# Altium PCB RS485_GPIO.PcbDoc (part 2 of 3)
Units mm, origin at the board's own origin, x right, y up, seen from the top; angles counter-clockwise.
Board outline 152.4 x 101.6 mm, 2 copper layers (Top Layer, Bottom Layer); 132 components, 100 nets, 460 pads, 0 vias.
Unrouted connection lines stored in the file: 308.
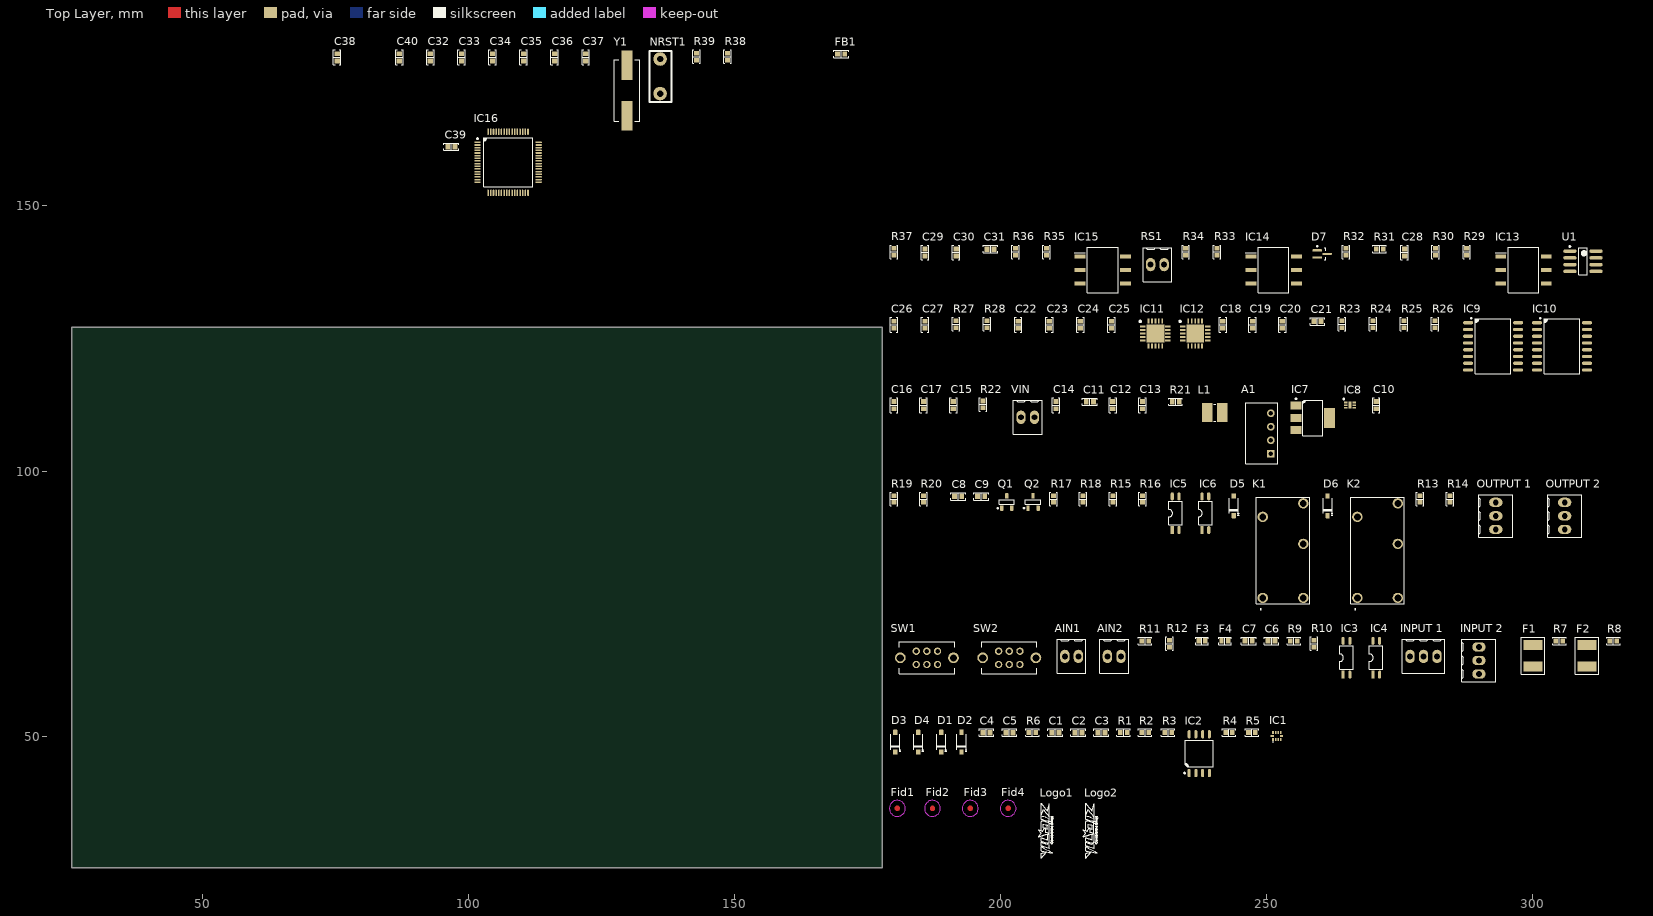
[diagram p0: Top Layer view]

## Part data (continued)
IC3 IC4 IC5 IC6: library part Optoisolator, Case/Package=SSOP, Collector Emitter Breakdown Voltage=80V, Collector Emitter Saturation Voltage=200mV, Current Transfer Ratio=260%, Forward Current=50mA, Forward Voltage=1.4V, Isolation Voltage=3.75kV, Manufacturer=Everlight, Max Operating Temperature=125°C, Max Power Dissipation=200mW, Min Operating Temperature=-55°C, Package Quantity=1, Reverse Breakdown Voltage=6V, Supplier Part Number 1=1080-1197-1-ND, Approvals=UL, Collector Emitter Voltage (VCEO)=80V, ComponentLink1Description=https://datasheet.ciiva.com/2086/el3h7-g-series-2086501.pdf?src-supplier=Digi-Key, ComponentLink1URL=https://datasheet.ciiva.com/2086/el3h7-g-series-2086501.pdf?src-supplier=Digi-Key, ComponentLink2Description=https://datasheet.ciiva.com/2086/el3h7-g-series-2086502.pdf?src-supplier=Digi-Key, ComponentLink2URL=https://datasheet.ciiva.com/2086/el3h7-g-series-2086502.pdf?src-supplier=Digi-Key, ComponentLink3Description=https://datasheet.ciiva.com/2086/el3h7-g-series-2086503.pdf?src-supplier=Digi-Key, ComponentLink3URL=https://datasheet.ciiva.com/2086/el3h7-g-series-2086503.pdf?src-supplier=Digi-Key, ComponentLink4Description=https://datasheet.ciiva.com/15209/getdatasheetpartid-416716-15209115.pdf?src-supplier=Verical, ComponentLink4URL=https://datasheet.ciiva.com/15209/getdatasheetpartid-416716-15209115.pdf?src-supplier=Verical, Fall Time=18000ns, Lead Free="Lead Free", Manufacturer Part Number=EL3H7(B)(TA)-VG, Max Collector Current=50mA, Max Input Current=50mA, Max Output Voltage=80V, Mount="Surface Mount", Number of Channels=1, Number of Elements=1, Number of Pins=4, Output Current per Channel=50mA, Packaging="Tape and Reel", Power Dissipation=200mW, Pricing 1="1 = 0,50000, 10 = 0,35500, 100 = 0,20730, 500 = 0,14212, 1000 = 0,11844, 2500 = 0,10660 (USD)", Radiation Hardening=No, Rise Time=18000ns, RoHS=Yes, Stock 1=29823, Supplier 1=Digi-Key
IC7: library part "TI UA78M33CDCYR", "Undefined or Miscellaneous", Case/Package=SOT-223-4, Dropout Voltage=2V, Manufacturer="Texas Instruments", Manufacturer Part Number=UA78M33CDCYR, Max Input Voltage=25V, Max Operating Temperature=125°C, Max Output Current=500mA, Min Input Voltage=5.3V, Min Operating Temperature=-40°C, Nominal Output Voltage=3.3V, Package Quantity=1, Power Supply Rejection Ratio (PSRR)=80dB, Quiescent Current=4.5mA, Supplier Part Number 1=296-13424-1-ND, ComponentLink1Description=https://datasheet.ciiva.com/46395/1882046-46395062.pdf?src-supplier=Element14, ComponentLink1URL=https://datasheet.ciiva.com/46395/1882046-46395062.pdf?src-supplier=Element14, ComponentLink2Description=https://datasheet.ciiva.com/7992/1882046-7992586.pdf?src-supplier=Element14, ComponentLink2URL=https://datasheet.ciiva.com/7992/1882046-7992586.pdf?src-supplier=Element14, ComponentLink3Description=https://datasheet.ciiva.com/2042/ua78m05-2042171.pdf?src-supplier=Digi-Key, ComponentLink3URL=https://datasheet.ciiva.com/2042/ua78m05-2042171.pdf?src-supplier=Digi-Key, ComponentLink4Description=https://datasheet.ciiva.com/3224/ua78m05-3224619.pdf?src-supplier=Avnet, ComponentLink4URL=https://datasheet.ciiva.com/3224/ua78m05-3224619.pdf?src-supplier=Avnet, ComponentLink5Description=https://datasheet.ciiva.com/2042/ua78m05-2042172.pdf?src-supplier=Digi-Key, ComponentLink5URL=https://datasheet.ciiva.com/2042/ua78m05-2042172.pdf?src-supplier=Digi-Key, ComponentLink6Description=https://datasheet.ciiva.com/26170/ua78m12-26170716.pdf?src-supplier=Avnet+Europe, ComponentLink6URL=https://datasheet.ciiva.com/26170/ua78m12-26170716.pdf?src-supplier=Avnet+Europe, ComponentLink7Description=https://datasheet.ciiva.com/2042/ua78m05-2042173.pdf?src-supplier=Digi-Key, ComponentLink7URL=https://datasheet.ciiva.com/2042/ua78m05-2042173.pdf?src-supplier=Digi-Key, ComponentLink8Description=https://datasheet.ciiva.com/41463/001015184-da-01-en-ic-reg-3-3v-u-ua78m33cdcyr-sot-223-4-tid-41463029.pdf?src-supplier=Conrad, ComponentLink8URL=https://datasheet.ciiva.com/41463/001015184-da-01-en-ic-reg-3-3v-u-ua78m33cdcyr-sot-223-4-tid-41463029.pdf?src-supplier=Conrad, Contact Plating=Tin,Matte, Lead Free="Lead Free", Mount="Surface Mount", Number of Outputs=1, Number of Pins=4, Number of Regulators=1, Output Current=500mA, Output Type=Fixed, Output Voltage=3.3V, Packaging="Tape and Reel", Polarity=Positive, Pricing 1="1 = 0,57000, 10 = 0,48800, 25 = 0,45520, 100 = 0,33800, 250 = 0,28600, 500 = 0,27300, 1000 = 0,20150 (USD)", Radiation Hardening=No, REACH SVHC="No SVHC", RoHS=Yes, Stock 1=37541, Supplier 1=Digi-Key, Weight=0.006632oz
IC8: library part "MICROCHIP MIC5353", "Integrated Circuit", Manufacturer=Microchip, Manufacturer Part Number=MIC5353YMT-TR, Supplier Part Number 1=576-3681-1-ND, ComponentLink1Description=http://www.farnell.com/datasheets/2245202.pdf?src-supplier=Farnell, ComponentLink1URL=http://www.farnell.com/datasheets/2245202.pdf?src-supplier=Farnell, ComponentLink2Description=http://www.microchip.com/mymicrochip/filehandler.aspx?ddocname=en579989&src-supplier=Digi-Key, ComponentLink2URL=http://www.microchip.com/mymicrochip/filehandler.aspx?ddocname=en579989&src-supplier=Digi-Key, ComponentLink3Description=http://www.farnell.com/datasheets/1692673.pdf?src-supplier=Element14, ComponentLink3URL=http://www.farnell.com/datasheets/1692673.pdf?src-supplier=Element14, ComponentLink4Description=https://datasheet.ciiva.com/2049/mic5353-2049344.pdf?src-supplier=Digi-Key, ComponentLink4URL=https://datasheet.ciiva.com/2049/mic5353-2049344.pdf?src-supplier=Digi-Key, ComponentLink5Description=https://datasheet.ciiva.com/2049/mic5353-2049342.pdf?src-supplier=Digi-Key, ComponentLink5URL=https://datasheet.ciiva.com/2049/mic5353-2049342.pdf?src-supplier=Digi-Key, ComponentLink6Description=https://datasheet.ciiva.com/2049/mic5353-2049343.pdf?src-supplier=Digi-Key, ComponentLink6URL=https://datasheet.ciiva.com/2049/mic5353-2049343.pdf?src-supplier=Digi-Key, Pricing 1="1 = 0,34000, 25 = 0,28000, 100 = 0,26000 (USD)", RoHS=Yes, Stock 1=1004, Supplier 1=Digi-Key
IC9 IC10: library part "SI LABS SI8652", Case/Package=SOIC, Isolated Power=No, Manufacturer="Silicon Labs", Manufacturer Part Number=Si8652AB-B-IS1R, Max Operating Temperature=125°C, Max Power Dissipation=415mW, Max Supply Voltage=5.5V, Min Operating Temperature=-40°C, Min Supply Voltage=2.7V, Operating Supply Current=4.1mA, Package Quantity=2500, Supplier Part Number 1=336-5216-1-ND, Channel Type=Unidirectional, ComponentLink1Description=https://datasheet.ciiva.com/29891/si86xx-29891881.pdf?src-supplier=Avnet, ComponentLink1URL=https://datasheet.ciiva.com/29891/si86xx-29891881.pdf?src-supplier=Avnet, ComponentLink2Description=https://datasheet.ciiva.com/29659/si86xx-29659290.pdf?src-supplier=Digi-Key, ComponentLink2URL=https://datasheet.ciiva.com/29659/si86xx-29659290.pdf?src-supplier=Digi-Key, Data Rate=1Mbps, Number of Channels=5, Number of Pins=16, Packaging="Tape and Reel", Pricing 1="1 = 2,10000, 25 = 2,02120, 100 = 1,94360 (USD)", Propagation Delay=35ns, Pulse Width Distortion (PWD)=25ns, RoHS=Yes, Stock 1=2236, Supplier 1=Digi-Key, Type="General Purpose"
IC11 IC12: library part "Maxim MAX31865", "RTD-to-Digital Converter", Case/Package=SSOP, Manufacturer=Maxim, Manufacturer Part Number=MAX31865AAP+T, Max Operating Temperature=125°C, Min Operating Temperature=-40°C, Supplier Part Number 1=MAX31865AAP+TCT-ND, ComponentLink1Description=https://datasheet.ciiva.com/14320/max31865-14320743.pdf?src-supplier=Avnet, ComponentLink1URL=https://datasheet.ciiva.com/14320/max31865-14320743.pdf?src-supplier=Avnet, ComponentLink2Description=https://datasheet.ciiva.com/25893/max31865-25893916.pdf?src-supplier=Avnet+Europe, ComponentLink2URL=https://datasheet.ciiva.com/25893/max31865-25893916.pdf?src-supplier=Avnet+Europe, ComponentLink3Description=https://datasheet.ciiva.com/14083/max31865-14083679.pdf?src-supplier=Digi-Key, ComponentLink3URL=https://datasheet.ciiva.com/14083/max31865-14083679.pdf?src-supplier=Digi-Key, ComponentLink4Description=https://media.digikey.com/pdf/Data%20Sheets/Maxim%20PDFs/PartNumberBreakdown_ds.pdf?src-supplier=Digi-Key, ComponentLink4URL=https://media.digikey.com/pdf/Data%20Sheets/Maxim%20PDFs/PartNumberBreakdown_ds.pdf?src-supplier=Digi-Key, ComponentLink5Description=http://www.farnell.com/datasheets/2345101.pdf?src-supplier=Farnell, ComponentLink5URL=http://www.farnell.com/datasheets/2345101.pdf?src-supplier=Farnell, ComponentLink6Description=http://www.mouser.com/ds/2/256/MAX31865-775735.pdf?src-supplier=Mouser, ComponentLink6URL=http://www.mouser.com/ds/2/256/MAX31865-775735.pdf?src-supplier=Mouser, ComponentLink7Description=https://datasheets.maximintegrated.com/en/ds/MAX31865.pdf?src-supplier=Digi-Key, ComponentLink7URL=https://datasheets.maximintegrated.com/en/ds/MAX31865.pdf?src-supplier=Digi-Key, Mount="Surface Mount", Output Type=SPI, Packaging="Tape and Reel", Pricing 1="1 = 5,14000, 10 = 4,64400, 25 = 4,42800, 100 = 3,67200, 250 = 3,51000 (USD)", RoHS=Yes, Stock 1=3767, Supplier 1=Digi-Key
IC13: "Integrated Circuit", Case/Package=SMD/SMT, Forward Current=60mA, Forward Voltage=1.2V, Isolation Voltage=7.5kV, Manufacturer="ON Semiconductor / Fairchild", Max Input Current=30mA, Max Operating Temperature=85°C, Max Output Current=50mA, Max Output Voltage=15V, Max Power Dissipation=250mW, Min Operating Temperature=-40°C, Output Voltage=16V, Package Quantity=1000, Reverse Breakdown Voltage=6V, Supplier Part Number 1=H11L1SVM-ND, ComponentLink1Description=https://datasheet.ciiva.com/2085/h11l1s-2085370.pdf?src-supplier=Digi-Key, ComponentLink1URL=https://datasheet.ciiva.com/2085/h11l1s-2085370.pdf?src-supplier=Digi-Key, ComponentLink2Description=https://datasheet.ciiva.com/2085/h11l1s-2085371.pdf?src-supplier=Digi-Key, ComponentLink2URL=https://datasheet.ciiva.com/2085/h11l1s-2085371.pdf?src-supplier=Digi-Key, ComponentLink3Description=https://datasheet.ciiva.com/26306/h11lx-eng-tds-26306987.pdf?src-supplier=Distrelec, ComponentLink3URL=https://datasheet.ciiva.com/26306/h11lx-eng-tds-26306987.pdf?src-supplier=Distrelec, ComponentLink4Description=https://datasheet.ciiva.com/2085/h11l1s-2085372.pdf?src-supplier=Digi-Key, ComponentLink4URL=https://datasheet.ciiva.com/2085/h11l1s-2085372.pdf?src-supplier=Digi-Key, ComponentLink5Description=http://www.farnell.com/datasheets/1874889.pdf?src-supplier=Farnell, ComponentLink5URL=http://www.farnell.com/datasheets/1874889.pdf?src-supplier=Farnell, ComponentLink6Description=http://www.farnell.com/datasheets/2303834.pdf?src-supplier=Farnell, ComponentLink6URL=http://www.farnell.com/datasheets/2303834.pdf?src-supplier=Farnell, ComponentLink7Description=https://www.fairchildsemi.com/datasheets/H1/H11L1M.pdf?src-supplier=Digi-Key, ComponentLink7URL=https://www.fairchildsemi.com/datasheets/H1/H11L1M.pdf?src-supplier=Digi-Key, ComponentLink8Description=http://www.onsemi.com/pub/Collateral/H11L3M-D.pdf?src-supplier=Digi-Key, ComponentLink8URL=http://www.onsemi.com/pub/Collateral/H11L3M-D.pdf?src-supplier=Digi-Key, ComponentLink9Description=http://www.farnell.com/datasheets/2303834.pdf?src-supplier=Newark, ComponentLink9URL=http://www.farnell.com/datasheets/2303834.pdf?src-supplier=Newark, ComponentLink10Description=https://datasheet.ciiva.com/15119/getdatasheetpartid-129979-15119729.pdf?src-supplier=Verical, ComponentLink10URL=https://datasheet.ciiva.com/15119/getdatasheetpartid-129979-15119729.pdf?src-supplier=Verical, ComponentLink11Description=https://datasheet.ciiva.com/29694/940174-29694862.pdf?src-supplier=Jameco, ComponentLink11URL=https://datasheet.ciiva.com/29694/940174-29694862.pdf?src-supplier=Jameco, ComponentLink12Description=https://datasheet.ciiva.com/2083/h11l1m-2083647.pdf?src-supplier=Digi-Key, ComponentLink12URL=https://datasheet.ciiva.com/2083/h11l1m-2083647.pdf?src-supplier=Digi-Key, Data Rate=1Mbps, Direction=Unidirectional, Fall Time=0.1us, Height=3.53mm, Input Current=60mA, Lead Free="Lead Free", Length=8.89mm, Manufacturer Part Number=H11L1SVM, Mount="Surface Mount", Number of Channels=1, Number of Circuits=1, Number of Elements=1, Number of Pins=6, Output Current=50mA, Output Current per Channel=50mA, Packaging=Bulk, Polarity=Inverting, Power Dissipation=250mW, Pricing 1="1 = 1,08000, 10 = 0,83600, 100 = 0,53750, 500 = 0,45392, 1000 = 0,35835, 2500 = 0,33446 (USD)", Propagation Delay=4000ns, Radiation Hardening=No, REACH SVHC="No SVHC", Reverse Voltage (DC)=6V, Rise Time=0.1us, RoHS=Yes, Stock 1=3464, Supplier 1=Digi-Key, Turn-On Delay Time=4000ns, Weight=0.81g, Width=6.6mm
IC14 IC15: "Integrated Circuit", Case/Package=SMD/SMT, Forward Current=60mA, Forward Voltage=1.2V, Isolation Voltage=7.5kV, Manufacturer="ON Semiconductor", Manufacturer Part Number=H11L1SR2M, Max Input Current=30mA, Max Operating Temperature=85°C, Max Output Current=50mA, Max Output Voltage=15V, Max Power Dissipation=250mW, Min Operating Temperature=-40°C, Output Voltage=16V, Package Quantity=1000, Reverse Breakdown Voltage=6V, Supplier Part Number 1=H11L1SR2MCT-ND, ComponentLink1Description=https://datasheet.ciiva.com/2085/h11l1s-2085370.pdf?src-supplier=Digi-Key, ComponentLink1URL=https://datasheet.ciiva.com/2085/h11l1s-2085370.pdf?src-supplier=Digi-Key, ComponentLink2Description=https://datasheet.ciiva.com/2085/h11l1s-2085371.pdf?src-supplier=Digi-Key, ComponentLink2URL=https://datasheet.ciiva.com/2085/h11l1s-2085371.pdf?src-supplier=Digi-Key, ComponentLink3Description=https://datasheet.ciiva.com/26306/h11lx-eng-tds-26306987.pdf?src-supplier=Distrelec, ComponentLink3URL=https://datasheet.ciiva.com/26306/h11lx-eng-tds-26306987.pdf?src-supplier=Distrelec, ComponentLink4Description=https://datasheet.ciiva.com/2085/h11l1s-2085372.pdf?src-supplier=Digi-Key, ComponentLink4URL=https://datasheet.ciiva.com/2085/h11l1s-2085372.pdf?src-supplier=Digi-Key, ComponentLink5Description=http://www.farnell.com/datasheets/1874889.pdf?src-supplier=Farnell, ComponentLink5URL=http://www.farnell.com/datasheets/1874889.pdf?src-supplier=Farnell, ComponentLink6Description=http://www.farnell.com/datasheets/2303834.pdf?src-supplier=Farnell, ComponentLink6URL=http://www.farnell.com/datasheets/2303834.pdf?src-supplier=Farnell, ComponentLink7Description=https://www.fairchildsemi.com/datasheets/H1/H11L1M.pdf?src-supplier=Digi-Key, ComponentLink7URL=https://www.fairchildsemi.com/datasheets/H1/H11L1M.pdf?src-supplier=Digi-Key, ComponentLink8Description=http://www.onsemi.com/pub/Collateral/H11L3M-D.pdf?src-supplier=Digi-Key, ComponentLink8URL=http://www.onsemi.com/pub/Collateral/H11L3M-D.pdf?src-supplier=Digi-Key, ComponentLink9Description=http://www.farnell.com/datasheets/2303834.pdf?src-supplier=Newark, ComponentLink9URL=http://www.farnell.com/datasheets/2303834.pdf?src-supplier=Newark, ComponentLink10Description=https://datasheet.ciiva.com/15119/getdatasheetpartid-129979-15119729.pdf?src-supplier=Verical, ComponentLink10URL=https://datasheet.ciiva.com/15119/getdatasheetpartid-129979-15119729.pdf?src-supplier=Verical, ComponentLink11Description=https://datasheet.ciiva.com/29694/940174-29694862.pdf?src-supplier=Jameco, ComponentLink11URL=https://datasheet.ciiva.com/29694/940174-29694862.pdf?src-supplier=Jameco, ComponentLink12Description=https://datasheet.ciiva.com/2083/h11l1m-2083647.pdf?src-supplier=Digi-Key, ComponentLink12URL=https://datasheet.ciiva.com/2083/h11l1m-2083647.pdf?src-supplier=Digi-Key, Data Rate=1Mbps, Direction=Unidirectional, Fall Time=0.1us, Height=3.53mm, Input Current=60mA, Lead Free="Lead Free", Length=8.89mm, Mount="Surface Mount", Number of Channels=1, Number of Circuits=1, Number of Elements=1, Number of Pins=6, Output Current=50mA, Output Current per Channel=50mA, Packaging=Bulk, Polarity=Inverting, Power Dissipation=250mW, Pricing 1="1 = 0,92000, 10 = 0,71400, 100 = 0,45900, 500 = 0,38760 (USD)", Pricing 2="1 = 1,08000, 10 = 0,83600, 100 = 0,53750, 500 = 0,45392, 1000 = 0,35835, 2500 = 0,33446 (USD)", Propagation Delay=4000ns, Radiation Hardening=No, REACH SVHC="No SVHC", Reverse Voltage (DC)=6V, Rise Time=0.1us, RoHS=No, Stock 1=23913, Stock 2=3464, Supplier 1=Digi-Key, Supplier 2=Digi-Key, Supplier Part Number 2=H11L1SVM-ND, Turn-On Delay Time=4000ns, Weight=0.81g, Width=6.6mm
IC16: library part "ST STM32F030RxT 64PIN", "32-bit ARM Cortex-M0 microcontroller", Case/Package=LQFP, Frequency=48MHz, Manufacturer=STMicroelectronics, Manufacturer Part Number=STM32F030R8T6TR, Max Operating Temperature=85°C, Max Power Dissipation=444mW, Max Supply Voltage=3.6V, Min Operating Temperature=-40°C, Min Supply Voltage=2.3V, Operating Supply Voltage=3.3V, Package Quantity=1000, Supplier Part Number 1=497-17335-1-ND, ComponentLink1Description=http://www.mouser.com/ds/2/389/stm32f030f4-956260.pdf?src-supplier=Mouser, ComponentLink1URL=http://www.mouser.com/ds/2/389/stm32f030f4-956260.pdf?src-supplier=Mouser, ComponentLink2Description=http://www.st.com/st-web-ui/static/active/en/resource/technical/document/datasheet/DM00088500.pdf?src-supplier=Avnet, ComponentLink2URL=http://www.st.com/st-web-ui/static/active/en/resource/technical/document/datasheet/DM00088500.pdf?src-supplier=Avnet, ComponentLink3Description=http://www.st.com/content/ccc/resource/technical/document/datasheet/a4/5d/0b/0e/87/c4/4d/71/DM00088500.pdf/files/DM00088500.pdf/jcr:content/translations/en.DM00088500.pdf?src-supplier=Digi-Key, ComponentLink3URL=http://www.st.com/content/ccc/resource/technical/document/datasheet/a4/5d/0b/0e/87/c4/4d/71/DM00088500.pdf/files/DM00088500.pdf/jcr:content/translations/en.DM00088500.pdf?src-supplier=Digi-Key, ComponentLink4Description=http://www.st.com/content/ccc/resource/technical/document/user_manual/1d/d4/af/64/18/0d/42/2c/DM00111791.pdf/files/DM00111791.pdf/jcr:content/translations/en.DM00111791.pdf?src-supplier=Digi-Key, ComponentLink4URL=http://www.st.com/content/ccc/resource/technical/document/user_manual/1d/d4/af/64/18/0d/42/2c/DM00111791.pdf/files/DM00111791.pdf/jcr:content/translations/en.DM00111791.pdf?src-supplier=Digi-Key, ComponentLink5Description=http://www.st.com/st-web-ui/static/active/en/resource/technical/document/datasheet/DM00088500.pdf?src-supplier=Avnet+Asia, ComponentLink5URL=http://www.st.com/st-web-ui/static/active/en/resource/technical/document/datasheet/DM00088500.pdf?src-supplier=Avnet+Asia, Core Architecture=ARM, Data Bus Width=32b, Interface=I2C,SPI,UART,USART, Lead Free="Lead Free", Max Frequency=48MHz, Memory Size=64KB, Memory Type=FLASH, Mount="Surface Mount", Number of ADC Channels=18, Number of I/Os=55, Number of Pins=64, Number of Programmable I/O=55, Number of Timers/Counters=6, Oscillator Type=Internal, Packaging="Tape and Reel", Peripherals=POR,PWM,WDT,DMA, Pricing 1="1 = 1,87000, 10 = 1,67900, 25 = 1,58400, 100 = 1,34960, 250 = 1,26720, 500 = 1,10880 (USD)", Radiation Hardening=No, RAM Size=8KB, RoHS=Yes, Stock 1=1142, Supplier 1=Digi-Key, Watchdog Timer=Yes, Weight=0.012088oz
"INPUT 1" "INPUT 2": library part "3 Pin", "TERM BLOCK HDR 3POS R/A 3.81MM", Color=Green, Current=6A, Manufacturer="On-Shore Technology", Manufacturer Part Number=OSTVN03A150, Max Operating Temperature=105°C, Min Operating Temperature=-30°C, Supplier Part Number 1=ED10562-ND, Voltage=125V, ComponentLink1Description=Datasheet, ComponentLink1URL=http://portal.fciconnect.com/Comergent//fci/drawing/20020110.pdf, ComponentLink2Description="Digi-Key Listing", ComponentLink2URL=http://www.digikey.ca/product-detail/en/20020110-D031A01LF/609-3820-ND/2261261, ComponentLink3Description=https://datasheet.ciiva.com/825/ostvnxxa150-825196.pdf?src-supplier=Digi-Key, ComponentLink3URL=https://datasheet.ciiva.com/825/ostvnxxa150-825196.pdf?src-supplier=Digi-Key, Contact Plating=Brass, Housing Material=Thermoplastic, Mount="Through Hole", Number of Levels=1, Number of Pins=3, Number of Positions Per Level=3, Packaging=Bulk, Pitch=0.1inch, Plating=Brass,Steel, Pricing 1="1 = 1,03000, 10 = 0,72600, 25 = 0,67720, 50 = 0,61480, 100 = 0,61200, 250 = 0,51680, 500 = 0,48960, 1000 = 0,43520, 5000 = 0,35360 (USD)", RoHS=Yes, Stock 1=6258, Supplier 1=Digi-Key, Termination=Screw, Wire Gauge (Max)=30AWG, Wire Gauge (Min)=20AWG
K1 K2: library part "Relay SPDT", "Relay or Contactor", Coil Current=80mA, Coil Power=400mW, Coil Resistance=62.5R, Coil Voltage (DC)=5V, Contact Current Rating=10A, Manufacturer=Panasonic, Manufacturer Part Number=ALQ105, Max Operating Temperature=85°C, Max Voltage Rating (AC)=250V, Min Operating Temperature=-40°C, Package Quantity=100, Supplier Part Number 1=255-3565-ND, Coil Type=Non-Latching, ComponentLink1Description=http://www.mouser.com/ds/2/315/lq-catalog-1075796.pdf?src-supplier=Mouser, ComponentLink1URL=http://www.mouser.com/ds/2/315/lq-catalog-1075796.pdf?src-supplier=Mouser, ComponentLink2Description=http://www.farnell.com/datasheets/2245159.pdf?src-supplier=Farnell, ComponentLink2URL=http://www.farnell.com/datasheets/2245159.pdf?src-supplier=Farnell, ComponentLink3Description=http://components.arrow.com/part/dataview/0323_06571492?src-supplier=Arrow+Europe, ComponentLink3URL=http://components.arrow.com/part/dataview/0323_06571492?src-supplier=Arrow+Europe, ComponentLink4Description=http://www.alliedelec.com/m/d/b3e6213128df2023f710f2e9cac83292.pdf?src-supplier=Allied+Electronics, ComponentLink4URL=http://www.alliedelec.com/m/d/b3e6213128df2023f710f2e9cac83292.pdf?src-supplier=Allied+Electronics, ComponentLink5Description=https://media.digikey.com/pdf/Data%20Sheets/Panasonic%20Electric%20Works%20PDFs/ALQ(LQ)Relays_NewProdIntro.pdf?src-supplier=Digi-Key, ComponentLink5URL=https://media.digikey.com/pdf/Data%20Sheets/Panasonic%20Electric%20Works%20PDFs/ALQ(LQ)Relays_NewProdIntro.pdf?src-supplier=Digi-Key, ComponentLink6Description=http://www.farnell.com/datasheets/1972641.pdf?src-supplier=Element14, ComponentLink6URL=http://www.farnell.com/datasheets/1972641.pdf?src-supplier=Element14, ComponentLink7Description=http://www.farnell.com/datasheets/2245159.pdf?src-supplier=Newark, ComponentLink7URL=http://www.farnell.com/datasheets/2245159.pdf?src-supplier=Newark, Contact Material=Silver, Depth=10mm, Height=16mm, Lead Free="Lead Free", Length=20mm, Number of Pins=5, Operate Time=20ms, Packaging=Carton, Power Consumption=400mW, Power Rating=400mW, Pricing 1="1 = 1,22000, 10 = 1,14800, 25 = 1,02000, 50 = 0,96900, 100 = 0,91800, 250 = 0,81600, 500 = 0,76500, 1000 = 0,71400, 5000 = 0,68850 (USD)", REACH SVHC=Unknown, Relay Type="General Purpose", Release Time=20ms, RoHS=Yes, Stock 1=8117, Supplier 1=Digi-Key, Termination="PC Pin", Throw Configuration=SPDT, Voltage Rating (AC)=250V, Weight=7g, Width=10mm
L1: library part "Inductor Iron Core", Manufacturer=Recom, Manufacturer Part Number=RLS-226, Supplier Part Number 1=945-30004971-ND, ComponentLink1Description=https://www.recom-power.com/pdf/Accessories/RLS-226.pdf?src-supplier=Digi-Key, ComponentLink1URL=https://www.recom-power.com/pdf/Accessories/RLS-226.pdf?src-supplier=Digi-Key, Inductance=22µH, Pricing 1="1 = 0,61000, 5 = 0,60400, 10 = 0,59500, 25 = 0,57760, 50 = 0,56000, 100 = 0,54250, 250 = 0,52500, 500 = 0,49000 (USD)", RoHS=No, Stock 1=50, Supplier 1=Digi-Key
Logo1 Logo2: library part Logo, "Schematic symbol for Logo"
NRST1: "Button, 2 pin", Case/Package=Radial, Max Current Rating=50mA, Max Operating Temperature=105°C, Max Voltage Rating (DC)=12V, Min Operating Temperature=-40°C, Operating Force=1.57N, Supplier Part Number 1=9707, ComponentLink1Description=Direnc.Net, ComponentLink1URL=https://www.direnc.net/6x6-9mm-tach-buton-2pin, Contact Material="Copper Alloy", Contact Plating=Silver, Depth=6.19mm, Length=6.19mm, Mount="Through Hole", Orientation=Straight, Packaging="Cut Type", Price=0,047, RoHS=Yes, Stock 1=574, Supplier 1=Direnc.Net, Termination="PC Pins", Voltage Rating (DC)=12V
"OUTPUT 1" "OUTPUT 2": library part "3 Pin", Color=Green, Current=6A, Manufacturer="On-Shore Technology", Manufacturer Part Number=OSTVN03A150, Max Operating Temperature=105°C, Min Operating Temperature=-30°C, Supplier Part Number 1=ED10562-ND, Voltage=125V, ComponentLink1Description=https://datasheet.ciiva.com/825/ostvnxxa150-825196.pdf?src-supplier=Digi-Key, ComponentLink1URL=https://datasheet.ciiva.com/825/ostvnxxa150-825196.pdf?src-supplier=Digi-Key, Contact Plating=Brass, Housing Material=Thermoplastic, Mount="Through Hole", Number of Levels=1, Number of Pins=3, Number of Positions Per Level=3, Packaging=Bulk, Pitch=0.1inch, Plating=Brass,Steel, Pricing 1="1 = 1,03000, 10 = 0,72600, 25 = 0,67720, 50 = 0,61480, 100 = 0,61200, 250 = 0,51680, 500 = 0,48960, 1000 = 0,43520, 5000 = 0,35360 (USD)", RoHS=Yes, Stock 1=6258, Supplier 1=Digi-Key, Termination=Screw, Wire Gauge (Max)=30AWG, Wire Gauge (Min)=20AWG
Q1 Q2: library part BC817, "Transistor, BC817", Current - Collector Cutoff (Max)="100nA (ICBO)", DC Current Gain (hFE) (Min) @ Ic, Vce="100 @ 100mA, 1V", Frequency - Transition=100MHz, Manufacturer="ON Semiconductor", Manufacturer Part Number=BC817-16LT1G, Operating Temperature="-65°C ~ 150°C (TJ)", Package / Case="TO-236-3, SC-59, SOT-23-3", Supplier Device Package="SOT-23-3 (TO-236)", Supplier Part Number 1=BC817-16LT1GOSCT-ND, Base Part Number=BC817, Category="Discrete Semiconductor Products", ComponentLink1Description=http://www.onsemi.com/pub/Collateral/BC817-16LT1-D.PDF, ComponentLink1URL=http://www.onsemi.com/pub/Collateral/BC817-16LT1-D.PDF, Mounting Type="Surface Mount", Packaging="Cut Tape (CT)", Part Status=Active, Price=0,13, Pricing 1="1=0.13, 10=0.118, 100=0.0642, 500=0.0395, 1000=0.02693 (USD)", RoHS="RoHS Compliant", Stock 1=46603, Supplier 1=Digi-Key, Transistor Type=NPN, Vce Saturation (Max) @ Ib, Ic="700mV @ 50mA, 500mA"
R1 R6: library part Resistor_Chip, "Ceramic, SMT Capacitor", Case/Package=0603, Case Code (Metric)=1608, Manufacturer=Yageo, Manufacturer Part Number=RC0603FR-07100RL, Max Operating Temperature=155°C, Min Operating Temperature=-55°C, Power Rating=100mW, Supplier Part Number 1=311-100HRDKR-ND, Temperature Coefficient=100ppm/°C, Tolerance=1%, Voltage Rating=50V, Case Code (Imperial)=0603, ComponentLink1Description=https://datasheet.ciiva.com/7660/38590-7660788.pdf?src-supplier=Element14, ComponentLink1URL=https://datasheet.ciiva.com/7660/38590-7660788.pdf?src-supplier=Element14, ComponentLink2Description=https://datasheet.ciiva.com/11808/0900766b80f96399-11808280.pdf?src-supplier=RSComponents, ComponentLink2URL=https://datasheet.ciiva.com/11808/0900766b80f96399-11808280.pdf?src-supplier=RSComponents, ComponentLink3Description=https://datasheet.ciiva.com/7746/1738695-7746237.pdf?src-supplier=Element14, ComponentLink3URL=https://datasheet.ciiva.com/7746/1738695-7746237.pdf?src-supplier=Element14, ComponentLink4Description=https://datasheet.ciiva.com/7746/1738695-7746238.pdf?src-supplier=Element14, ComponentLink4URL=https://datasheet.ciiva.com/7746/1738695-7746238.pdf?src-supplier=Element14, ComponentLink5Description=https://datasheet.ciiva.com/22747/443971-22747518.pdf?src-supplier=Element14, ComponentLink5URL=https://datasheet.ciiva.com/22747/443971-22747518.pdf?src-supplier=Element14, ComponentLink6Description=https://datasheet.ciiva.com/46440/1868787-46440890.pdf?src-supplier=Element14, ComponentLink6URL=https://datasheet.ciiva.com/46440/1868787-46440890.pdf?src-supplier=Element14, Composition="Thick Film", Depth=0.8mm, Height=0.45mm, Lead Free="Lead Free", Length=1.6mm, Military Standard=Not, Number of Pins=2, Packaging="Tape and Reel", Pricing 1="1 = 0,10000, 10 = 0,02300, 100 = 0,00940, 1000 = 0,00421, 2500 = 0,00366 (USD)", REACH SVHC=Unknown, Resistance=100R, RoHS=Yes, Stock 1=12121627, Supplier 1=Digi-Key, Termination=SMD/SMT, Voltage Rating (DC)=50V, Width=0.8mm
R2 R3 R4 R5: library part Resistor_Chip, "Ceramic, SMT Capacitor", Case/Package=0603, Case Code (Metric)=1608, Manufacturer="Stackpole Electronics", Manufacturer Part Number=RMCF0603FT1K10, Max Operating Temperature=155°C, Max Power Dissipation=100mW, Min Operating Temperature=-55°C, Supplier Part Number 1=RMCF0603FT1K10CT-ND, Temperature Coefficient=100ppm/°C, Tolerance=1%, Case Code (Imperial)=0603, Composition="Thick Film", Contact Plating=Matte,Tin, Features="Automotive AEC-Q200", Height=0.022inch, Lead Free="Lead Free", Length=0.061inch, Mount="Surface Mount", Number of Terminations=2, Packaging="Tape and Reel", Power Rating=100mW, Pricing 1="1 = 0,10000, 10 = 0,01800, 100 = 0,00710, 1000 = 0,00321, 2500 = 0,00278 (USD)", Radiation Hardening=No, Resistance=1.1kR, RoHS=Yes, Stock 1=27246, Supplier 1=Digi-Key, Width=0.031inch
R7 R8 R19 R20 R22 R23 R24 R25 R26 R29 R33 R35 R39: library part Resistor_Chip, "Ceramic, SMT Capacitor", Case/Package=0603, Case Code (Metric)=1608, Manufacturer="Stackpole Electronics", Manufacturer Part Number=RNCP0603FTD10K0, Max Operating Temperature=155°C, Max Power Dissipation=125mW, Min Operating Temperature=-55°C, Supplier Part Number 1=RNCP0603FTD10K0CT-ND, Temperature Coefficient=100ppm/°C, Tolerance=1%, Case Code (Imperial)=0603, Composition="Thin Film", Contact Plating=Matte,Tin, Features="Anti-Sulfur,Moisture Resistant", Height=0.02inch, Lead Free="Lead Free", Length=0.059inch, Mount="Surface Mount", Number of Terminations=2, Packaging="Tape and Reel", Pricing 1="1 = 0,10000, 10 = 0,06700, 100 = 0,02730, 1000 = 0,01224, 2500 = 0,01063 (USD)", Radiation Hardening=No, Resistance=10kR, RoHS=Yes, Stock 1=183083, Supplier 1=Digi-Key, Width=0.031inch
R9 R10 R15 R16 R38: library part Resistor_Chip, "Ceramic, SMT Capacitor", Case/Package=0603, Case Code (Metric)=1608, Manufacturer=Rohm, Manufacturer Part Number=ESR03EZPJ561, Max Operating Temperature=155°C, Max Power Dissipation=250mW, Min Operating Temperature=-55°C, Package Quantity=1, Supplier Part Number 1=RHM560DCT-ND, Temperature Coefficient=200ppm/°C, Tolerance=5%, Case Code (Imperial)=0603, ComponentLink1Description=http://www.rohm.com/web/global/datasheet/ESR01MZPF/esr-e, ComponentLink1URL=http://www.rohm.com/web/global/datasheet/ESR01MZPF/esr-e, ComponentLink2Description=https://www.rohm.com/datasheet/ESR01MZPF/esr-e, ComponentLink2URL=https://www.rohm.com/datasheet/ESR01MZPF/esr-e, Composition="Thick Film", Features="Automotive AEC-Q200", Height=0.022inch, Length=0.063inch, Number of Terminations=2, Packaging="Tape and Reel", Pricing 1="1 = 0,10000, 10 = 0,08700, 100 = 0,03330, 1000 = 0,01464, 2500 = 0,01264 (USD)", Resistance=560R, RoHS=Yes, Stock 1=14494, Supplier 1=Digi-Key, Width=0.031inch
R11 R12: library part Resistor_Chip, "Ceramic, SMT Capacitor", Case/Package=0603, Case Code (Metric)=1608, Manufacturer=Yageo, Manufacturer Part Number=RC0603FR-07150RL, Max Operating Temperature=155°C, Min Operating Temperature=-55°C, Package Quantity=5000, Power Rating=100mW, Supplier Part Number 1=311-150HRCT-ND, Temperature Coefficient=100ppm/°C, Tolerance=1%, Voltage Rating=50V, Case Code (Imperial)=0603, ComponentLink1Description=https://datasheet.ciiva.com/46440/1868787-46440893.pdf?src-supplier=Element14, ComponentLink1URL=https://datasheet.ciiva.com/46440/1868787-46440893.pdf?src-supplier=Element14, ComponentLink2Description=https://datasheet.ciiva.com/12555/rc0603-272842-12555301.pdf?src-supplier=Mouser, ComponentLink2URL=https://datasheet.ciiva.com/12555/rc0603-272842-12555301.pdf?src-supplier=Mouser, ComponentLink3Description=https://datasheet.ciiva.com/46412/443971-46412844.pdf?src-supplier=Element14, ComponentLink3URL=https://datasheet.ciiva.com/46412/443971-46412844.pdf?src-supplier=Element14, Composition="Thick Film", Depth=0.8mm, Height=0.45mm, Lead Free="Lead Free", Length=1.6mm, Military Standard=Not, Number of Pins=2, Packaging="Tape and Reel", Pricing 1="1 = 0,10000, 10 = 0,02300, 100 = 0,00940, 1000 = 0,00421, 2500 = 0,00366 (USD)", REACH SVHC="No SVHC", Resistance=150R, RoHS=Yes, Stock 1=2591507, Supplier 1=Digi-Key, Termination=SMD/SMT, Voltage Rating (DC)=50V, Width=0.8mm
R13 R14: library part Resistor_Chip, "Ceramic, SMT Capacitor", Resistance=NC
R17 R18: library part Resistor_Chip, "Ceramic, SMT Capacitor", Case/Package=0603, Case Code (Metric)=1608, Manufacturer=Rohm, Manufacturer Part Number=ESR03EZPJ102, Max Operating Temperature=155°C, Max Power Dissipation=250mW, Min Operating Temperature=-55°C, Package Quantity=1, Supplier Part Number 1=RHM1.0KDCT-ND, Temperature Coefficient=200ppm/°C, Tolerance=5%, Case Code (Imperial)=0603, ComponentLink1Description=https://datasheet.ciiva.com/2469/esr-2469603.pdf?src-supplier=Digi-Key, ComponentLink1URL=https://datasheet.ciiva.com/2469/esr-2469603.pdf?src-supplier=Digi-Key, ComponentLink2Description=https://datasheet.ciiva.com/2469/esr-2469604.pdf?src-supplier=Digi-Key, ComponentLink2URL=https://datasheet.ciiva.com/2469/esr-2469604.pdf?src-supplier=Digi-Key, ComponentLink3Description=https://datasheet.ciiva.com/2469/esr-2469605.pdf?src-supplier=Digi-Key, ComponentLink3URL=https://datasheet.ciiva.com/2469/esr-2469605.pdf?src-supplier=Digi-Key, Composition="Thick Film", Features="Automotive AEC-Q200", Height=0.022inch, Lead Free="Lead Free", Length=0.063inch, Number of Terminations=2, Packaging="Tape and Reel", Pricing 1="1 = 0,10000, 10 = 0,08300, 100 = 0,03180, 1000 = 0,01398, 2500 = 0,01207 (USD)", Resistance=1kR, RoHS=Yes, Stock 1=148117, Supplier 1=Digi-Key, Width=0.031inch
R21: library part Resistor_Chip, "Ceramic, SMT Capacitor", Case/Package=0603, Case Code (Metric)=1608, Manufacturer=Yageo, Manufacturer Part Number=RC0603FR-0714KL, Max Operating Temperature=155°C, Max Power Dissipation=100mW, Min Operating Temperature=-55°C, Package Quantity=1, Supplier Part Number 1=311-14.0KHRCT-ND, Temperature Coefficient=100ppm/°C, Tolerance=1%, Voltage Rating=75V, Voltage Rating (DC)=50V, Case Code (Imperial)=0603, ComponentLink1Description=https://datasheet.ciiva.com/15189/getdatasheetpartid-325152-15189610.pdf?src-supplier=Verical, ComponentLink1URL=https://datasheet.ciiva.com/15189/getdatasheetpartid-325152-15189610.pdf?src-supplier=Verical, ComponentLink2Description=https://datasheet.ciiva.com/2455/pyu-r-int-thick-7-2455089.pdf?src-supplier=Digi-Key, ComponentLink2URL=https://datasheet.ciiva.com/2455/pyu-r-int-thick-7-2455089.pdf?src-supplier=Digi-Key, ComponentLink3Description=https://datasheet.ciiva.com/2455/pyu-r-int-thick-7-2455090.pdf?src-supplier=Digi-Key, ComponentLink3URL=https://datasheet.ciiva.com/2455/pyu-r-int-thick-7-2455090.pdf?src-supplier=Digi-Key, ComponentLink4Description=https://datasheet.ciiva.com/2455/pyu-r-int-thick-7-2455091.pdf?src-supplier=Digi-Key, ComponentLink4URL=https://datasheet.ciiva.com/2455/pyu-r-int-thick-7-2455091.pdf?src-supplier=Digi-Key, Composition="Thick Film", Depth=0.8mm, Features="Moisture Resistant", Height=0.022inch, Lead Free="Lead Free", Length=1.6mm, Military Standard=Not, Number of Terminations=2, Packaging="Tape and Reel", Power Rating=100mW, Pricing 1="1 = 0,10000, 10 = 0,02300, 100 = 0,00940, 1000 = 0,00421, 2500 = 0,00366 (USD)", Resistance=14kR, RoHS=Yes, Stock 1=622097, Supplier 1=Digi-Key, Termination=SMD/SMT, Weight=7.1E-05oz, Width=0.031inch
R27 R28: library part Resistor_Chip, "Ceramic, SMT Capacitor", Case/Package=0603, Case Code (Metric)=1608, Manufacturer="Vishay Dale Thin Film", Manufacturer Part Number=PAT0603E4000BST1, Max Operating Temperature=155°C, Max Power Dissipation=150mW, Min Operating Temperature=-55°C, Package Quantity=1, Supplier Part Number 1=PAT400ACT-ND, Temperature Coefficient=25ppm/°C, Tolerance=0.1%, Voltage Rating=75V, Case Code (Imperial)=0603, ComponentLink1Description=https://datasheet.ciiva.com/2529/pat-2529079.pdf?src-supplier=Digi-Key, ComponentLink1URL=https://datasheet.ciiva.com/2529/pat-2529079.pdf?src-supplier=Digi-Key, ComponentLink2Description=https://datasheet.ciiva.com/2529/pat-2529080.pdf?src-supplier=Digi-Key, ComponentLink2URL=https://datasheet.ciiva.com/2529/pat-2529080.pdf?src-supplier=Digi-Key, ComponentLink3Description=https://datasheet.ciiva.com/2529/pat-2529081.pdf?src-supplier=Digi-Key, ComponentLink3URL=https://datasheet.ciiva.com/2529/pat-2529081.pdf?src-supplier=Digi-Key, Composition="Thin Film", Depth=0.81mm, Features="Moisture Resistant,Automotive AEC-Q200,Anti-Sulfur", Height=0.018inch, Length=0.064inch, Military Standard=Not, Number of Terminations=2, Packaging="Tape and Reel", Power Rating=150mW, Pricing 1="1 = 0,92000, 10 = 0,79900, 100 = 0,55660 (USD)", Resistance=400R, RoHS=Yes, Stock 1=20512, Supplier 1=Digi-Key, Termination=SMD/SMT, Width=0.762mm
R30 R34 R36: library part Resistor_Chip, "Ceramic, SMT Capacitor", Case/Package=0603, Case Code (Metric)=1608, Manufacturer=Panasonic, Manufacturer Part Number=ERJ-3EKF3480V, Max Operating Temperature=155°C, Max Power Dissipation=100mW, Min Operating Temperature=-55°C, Package Quantity=1, Supplier Part Number 1=P348HCT-ND, Temperature Coefficient=100ppm/°C, Tolerance=1%, Voltage Rating=75V, Voltage Rating (DC)=50V, Case Code (Imperial)=0603, ComponentLink1Description=https://www.te.com/commerce/DocumentDelivery/DDEController?Action=srchrtrv&amp;DocNm=1773204-3&amp;DocType=DS&amp;DocLang=English&src-supplier=Digi-Key, ComponentLink1URL=https://www.te.com/commerce/DocumentDelivery/DDEController?Action=srchrtrv&amp;DocNm=1773204-3&amp;DocType=DS&amp;DocLang=English&src-supplier=Digi-Key, ComponentLink2Description=https://datasheet.ciiva.com/46420/1678782-46420344.pdf?src-supplier=Element14, ComponentLink2URL=https://datasheet.ciiva.com/46420/1678782-46420344.pdf?src-supplier=Element14, ComponentLink3Description=https://datasheet.ciiva.com/7942/aoa0000ce2-7942375.pdf?src-supplier=Element14, ComponentLink3URL=https://datasheet.ciiva.com/7942/aoa0000ce2-7942375.pdf?src-supplier=Element14, ComponentLink4Description=https://datasheet.ciiva.com/9182/aoa0000ce2-9182777.pdf?src-supplier=Avnet, ComponentLink4URL=https://datasheet.ciiva.com/9182/aoa0000ce2-9182777.pdf?src-supplier=Avnet, ComponentLink5Description=https://datasheet.ciiva.com/22755/1678782-22755209.pdf?src-supplier=Farnell, ComponentLink5URL=https://datasheet.ciiva.com/22755/1678782-22755209.pdf?src-supplier=Farnell, ComponentLink6Description=https://datasheet.ciiva.com/16781/70260748-16781706.pdf?src-supplier=Allied+Electronics, ComponentLink6URL=https://datasheet.ciiva.com/16781/70260748-16781706.pdf?src-supplier=Allied+Electronics, ComponentLink7Description=https://datasheet.ciiva.com/30214/aoa0000ce2-30214186.pdf?src-supplier=Onlinecomponents.com, ComponentLink7URL=https://datasheet.ciiva.com/30214/aoa0000ce2-30214186.pdf?src-supplier=Onlinecomponents.com, ComponentLink8Description=https://datasheet.ciiva.com/24071/aoa0000ce2-24071771.pdf?src-supplier=Mouser, ComponentLink8URL=https://datasheet.ciiva.com/24071/aoa0000ce2-24071771.pdf?src-supplier=Mouser, ComponentLink9Description=https://datasheet.ciiva.com/16773/70260748-16773502.pdf?src-supplier=Allied+Electronics, ComponentLink9URL=https://datasheet.ciiva.com/16773/70260748-16773502.pdf?src-supplier=Allied+Electronics, Composition="Thick Film", Contact Plating=Tin, Depth=0.8mm, Features="Automotive AEC-Q200", Height=0.45mm, Lead Free="Lead Free", Length=1.6mm, Military Standard=Not, Mount="Surface Mount", Number of Terminations=2, Packaging="Tape and Reel", Power Rating=100mW, Pricing 1="1 = 0,10000, 10 = 0,05000, 100 = 0,02020, 1000 = 0,00909, 2500 = 0,00789 (USD)", REACH SVHC="No SVHC", Resistance=348R, RoHS=Yes, Stock 1=184979, Supplier 1=Digi-Key, Termination=SMD/SMT, Width=0.031inch
R31 R32: library part Resistor_Chip, "Ceramic, SMT Capacitor", Case/Package=0603, Manufacturer=Rohm, Manufacturer Part Number=ESR03EZPJ100, Supplier Part Number 1=RHM10DCT-ND, Pricing 1="1 = 0,10000, 10 = 0,08700, 100 = 0,03330, 1000 = 0,01464, 2500 = 0,01264 (USD)", Resistance=10R, RoHS=Yes, Stock 1=70067, Supplier 1=Digi-Key
R37: library part Resistor_Chip, "Ceramic, SMT Capacitor", Case/Package=0603, Case Code (Metric)=1608, Manufacturer=Susumu, Manufacturer Part Number=RR0816P-121-D, Max Operating Temperature=125°C, Max Power Dissipation=63mW, Min Operating Temperature=-55°C, Package Quantity=1, Supplier Part Number 1=RR08P120DCT-ND, Temperature Coefficient=25ppm/°C, Tolerance=0.5%, Voltage Rating=75V, Case Code (Imperial)=0603, ComponentLink1Description=http://www.susumu.co.jp/common/pdf/n_catalog_partition05_en.pdf, ComponentLink1URL=http://www.susumu.co.jp/common/pdf/n_catalog_partition05_en.pdf, ComponentLink2Description=http://documents.rs-components.com/techlib://itc_doclist_GB.htm?stockno=4744287, ComponentLink2URL=http://documents.rs-components.com/techlib://itc_doclist_GB.htm?stockno=4744287, Composition="Thin Film", Depth=0.8mm, Height=0.02inch, Height - Seated (Max)=0.02inch, Lead Free="Lead Free", Length=0.063inch, Number of Pins=2, Number of Terminations=2, Packaging="Tape and Reel", Power Rating=63mW, Pricing 1="1 = 0,11000, 10 = 0,09800, 100 = 0,03760, 1000 = 0,01654, 2500 = 0,01428 (USD)", REACH SVHC=Unknown, Resistance=120R, RoHS=Yes, Stock 1=6882, Supplier 1=Digi-Key, Termination=SMD/SMT, Voltage Rating (DC)=75V, Width=0.032inch
SW1 SW2: library part "DPDT Switch", "Switch THD right-angle toggle DPDT", Contact Current Rating=300mA, Manufacturer="ITT C&K", Manufacturer Part Number=SK22D01MG5NS, Package Quantity=1000, Supplier Part Number 1=CKN10364-ND, Voltage Rating (DC)=30V, Actuator Length=5mm, Actuator Material=PBT,Polybutylene, Actuator Type=Standard, ComponentLink1Description=https://datasheet.ciiva.com/5279/sk-22d01-mg-190328-5279988.pdf?src-supplier=Mouser, ComponentLink1URL=https://datasheet.ciiva.com/5279/sk-22d01-mg-190328-5279988.pdf?src-supplier=Mouser, ComponentLink2Description=https://datasheet.ciiva.com/2889/sk-22d01-mg-2889186.pdf?src-supplier=Digi-Key, ComponentLink2URL=https://datasheet.ciiva.com/2889/sk-22d01-mg-2889186.pdf?src-supplier=Digi-Key, Contact Plating=Silver, Current Rating=300mA, Electrical Life=10000Cycles, Illumination Type=Non-Illuminated, Mount="Through Hole", Packaging=Bulk, Pricing 1="1 = 0,69000, 10 = 0,66900, 25 = 0,64320, 100 = 0,55820, 250 = 0,50936, 500 = 0,47334, 1000 = 0,42446, 2500 = 0,39874, 5000 = 0,37044 (USD)", RoHS=Yes, Stock 1=4200, Supplier 1=Digi-Key, Switch Function=On-On, Switch Travel=2mm, Termination="PC Pin", Throw Configuration=DPDT
U1: library part SN75HVD3082, "RS485 Tranciever", Case/Package=D, Manufacturer="Texas Instruments", Manufacturer Part Number=SN75ALS176DR, Max Operating Temperature=70°C, Max Supply Current=30mA, Max Supply Voltage=5.25V, Min Operating Temperature=0°C, Min Supply Voltage=4.75V, Operating Supply Voltage=5V, Package Quantity=1, Supplier Part Number 1=296-14966-1-ND, ComponentLink1Description=http://www.intersil.com/content/dam/Intersil/documents/isl8/isl83483-85-88-90-91.pdf, ComponentLink1URL=http://www.intersil.com/content/dam/Intersil/documents/isl8/isl83483-85-88-90-91.pdf, ComponentLink2Description=https://datasheet.ciiva.com/26837/sn75als176dr-26837272.pdf?src-supplier=IIIC, ComponentLink2URL=https://datasheet.ciiva.com/26837/sn75als176dr-26837272.pdf?src-supplier=IIIC, ComponentLink3Description=https://datasheet.ciiva.com/14427/sn75als176a-14427911.pdf?src-supplier=Avnet, ComponentLink3URL=https://datasheet.ciiva.com/14427/sn75als176a-14427911.pdf?src-supplier=Avnet, ComponentLink4Description=https://datasheet.ciiva.com/1703/sn65als176-1703130.pdf?src-supplier=Digi-Key, ComponentLink4URL=https://datasheet.ciiva.com/1703/sn65als176-1703130.pdf?src-supplier=Digi-Key, ComponentLink5Description=https://datasheet.ciiva.com/1703/sn65als176-1703132.pdf?src-supplier=Digi-Key, ComponentLink5URL=https://datasheet.ciiva.com/1703/sn65als176-1703132.pdf?src-supplier=Digi-Key, ComponentLink6Description=https://datasheet.ciiva.com/1703/sn65als176-1703131.pdf?src-supplier=Digi-Key, ComponentLink6URL=https://datasheet.ciiva.com/1703/sn65als176-1703131.pdf?src-supplier=Digi-Key, ComponentLink7Description=https://datasheet.ciiva.com/48707/001048080-da-01-en-ic-dff-bus-tvr-s-sn75als176dr-soic-8-tid-48707959.pdf?src-supplier=Conrad, ComponentLink7URL=https://datasheet.ciiva.com/48707/001048080-da-01-en-ic-dff-bus-tvr-s-sn75als176dr-soic-8-tid-48707959.pdf?src-supplier=Conrad, Contact Plating=Gold, Data Rate=35Mbps, ESD Protection=No, Height=1.58mm, Lead Free="Lead Free", Length=4.9mm, Logic Function=Transceiver, Nominal Supply Current=30mA, Number of Drivers=1, Number of Pins=8, Number of Receivers=1, Number of Transceivers=1, Number of Transmitters=1, Operating Supply Current=30mA, Packaging="Tape and Reel", Pricing 1="1 = 0,99000, 10 = 0,88500, 25 = 0,84000, 100 = 0,69000, 250 = 0,64500, 500 = 0,57000, 1000 = 0,45000 (USD)", Radiation Hardening=No, RoHS=Yes, Simplex/Duplex="Half Duplex", Stock 1=1940, Supplier 1=Digi-Key, Weight=0.002561oz, Width=3.91mm
Y1: library part "Abracon Crystal ABLS", "SMT Crystal", Case/Package=SMD/SMT, ESR (Equivalent Series Resistance)=80R, Frequency Stability=50ppm, Frequency Tolerance=30ppm, Load Capacitance=18pF, Manufacturer=Abracon, Manufacturer Part Number=ABLS-8.000MHZ-B4-T, Max Operating Temperature=70°C, Min Operating Temperature=-20°C, Package Quantity=1000, Supplier Part Number 1=535-10212-1-ND, ComponentLink1Description=https://abracon.com/Support/PackageDrawing/Resonators/ABLS-2D.pdf?src-supplier=Digi-Key, ComponentLink1URL=https://abracon.com/Support/PackageDrawing/Resonators/ABLS-2D.pdf?src-supplier=Digi-Key, ComponentLink2Description=http://www.abracon.com/Support/PackageDrawing/Resonators/ABLS-2D.pdf?src-supplier=Avnet, ComponentLink2URL=http://www.abracon.com/Support/PackageDrawing/Resonators/ABLS-2D.pdf?src-supplier=Avnet, ComponentLink3Description=http://www.abracon.com/Support/PackageDrawing/Resonators/ABLS-2D.pdf?src-supplier=Mouser, ComponentLink3URL=http://www.abracon.com/Support/PackageDrawing/Resonators/ABLS-2D.pdf?src-supplier=Mouser, Depth=4.7mm, Frequency=8MHz, Height=0.165inch, Lead Free="Lead Free", Length=11.4mm, Mount="Surface Mount", Packaging="Tape and Reel", Price=0,25, Pricing 1="1 = 0,25000, 10 = 0,20900, 50 = 0,18820, 100 = 0,16720, 500 = 0,15884 (USD)", Radiation Hardening=No, REACH SVHC=Yes, RoHS=Yes, Series Resistance=80R, Stock 1=68875, Supplier 1=Digi-Key, Termination=SMD/SMT, Tolerance=30ppm, Width=0.185inch

## Nets (pads, with @x,y where several pads share a name; then routed paths per layer and width w, separated by ;. In a path a pad name is that pad's centre, name@x,y a point inside that pad or via, vN(x,y) a via of type N, cw(c..) or ccw(c..) an arc to the next point about the centre after c; other vN are vias at no path point)
3v3: C2.2 C17.2 C18.2 C20.2 C31.2 C32.2 C33.2 C34.2 C35.2 FB1.2 IC2.1 IC8.4 IC9.1 IC10.1 IC13.6 IC16.1 IC16.32 IC16.64 R2.1 R3.1 R7.2 R8.2 R21.2 R23.1 R25.1 R29.1 R39.2
3v3ISO: C1.2 C3.2 C14.2 C19.2 C21.2 C22.2 C23.2 C24.2 C25.2 D1.2 D2.2 IC1.8 IC2.8 IC7.3 IC9.16 IC10.16 IC11.19 IC11.20 IC12.19 IC12.20 R4.1 R5.1 R24.2 R26.2
4-20mA_1: R1.1 R11.1 SW1.3
4-20mA_2: R6.1 R12.1 SW2.3
5Visolated: A1.4 C10.2 C13.2 IC8.1 IC8.3
24V: A1.2 C10.1 C12.2 D5.2 D6.2 F1.2 F2.2 F3.2 F4.2 IC5.4 IC6.4 IC7.1 L1.2 R13.2 R14.2
AIN1: C4.2 D1.1 D3.2 IC1.4 R1.2
AIN2: C5.2 D2.1 D4.2 IC1.5 R6.2
BOOT0: IC16.60 R38.2
DRDY1: IC9.11 IC11.18
DRDY2: IC10.11 IC12.18
GND: A1.3 C2.1 C8.1 C9.1 C13.1 C15.2 C16.1 C17.1 C18.1 C20.1 C31.1 C32.1 C33.1 C34.1 C35.1 C36.1 C37.1 C38.1 C39.1 C40.2 IC2.4 IC3.3 IC4.3 IC5.2 IC6.2 IC8.2 IC8.7 IC9.8 IC10.8 IC13.5 IC14.2 IC15.2 IC16.12 IC16.31 IC16.63 NRST1.1 R11.2 R12.2 R22.2 R38.1
GND_ISO: "INPUT 1.1" "INPUT 2.1" A1.1 C1.1 C3.1 C4.1 C5.1 C6.1 C7.1 C11.1 C12.1 C14.1 C15.1 C19.1 C21.1 C22.1 C23.1 C24.1 C25.1 C28.1 C29.1 C30.1 D3.1 D4.1 D7.3 IC1.1 IC1.3 IC2.5 IC3.2 IC4.2 IC7.2 IC7.4 IC9.9 IC10.9 IC11.6 IC11.10 IC11.15 IC11.16 IC11.21 IC12.6 IC12.10 IC12.15 IC12.16 IC12.21 IC13.2 IC14.5 IC15.5 Q1.2 Q2.2 R19.2 R20.2 U1.5 VIN.2
MasterDE: IC14.4 R33.2 U1.2 U1.3
MasterRcv: R30.2 U1.1
MasterTrx: IC15.4 R35.2 U1.4
MISO1: IC9.12 IC11.14
MISO2: IC10.12 IC12.14
MOSI1: IC9.14 IC11.11
MOSI2: IC10.14 IC12.11
nCS1: IC9.13 IC11.13
nCS2: IC10.13 IC12.13
NetAIN1_1: AIN1.1 SW1.5
NetAIN1_2: AIN1.2 SW1.2
NetAIN2_1: AIN2.1 SW2.5
NetAIN2_2: AIN2.2 SW2.2
NetC6_2: C6.2 IC3.1 R9.2
NetC7_2: C7.2 IC4.1 R10.2
NetC8_2: C8.2 IC5.1 R15.2
NetC9_2: C9.2 IC6.1 R16.2
NetC11_2: C11.2 L1.1 VIN.1
NetC16_2: C16.2 IC8.6
NetD5_1: D5.1 K1.5 Q1.3
NetD6_1: D6.1 K2.5 Q2.3
NetF1_1: "INPUT 1.3" F1.1
NetF2_1: "INPUT 2.3" F2.1
NetF3_1: F3.1 SW1.6
NetF4_1: F4.1 SW2.6
NetIC2_2: IC2.2 IC16.30 R3.2
NetIC2_3: IC2.3 IC16.29 R2.2
NetIC3_4: IC3.4 IC16.24 R7.1
NetIC4_4: IC4.4 IC16.25 R8.1
NetIC5_3: IC5.3 R17.2
NetIC6_3: IC6.3 R18.2
NetIC8_5: IC8.5 R21.1 R22.1
NetIC9_2: IC9.2 IC16.21
NetIC9_3: IC9.3 IC16.23
NetIC9_4: IC9.4 IC16.20
NetIC9_5: IC9.5 IC16.22
NetIC9_6: IC9.6 IC16.19
NetIC9_7: IC9.7 R23.2
NetIC9_10: IC9.10 R24.1
NetIC10_2: IC10.2 IC16.33
NetIC10_3: IC10.3 IC16.36
NetIC10_4: IC10.4 IC16.34
NetIC10_5: IC10.5 IC16.35
NetIC10_6: IC10.6 IC16.37
NetIC10_7: IC10.7 R25.2
NetIC10_10: IC10.10 R26.1
NetIC11_1: IC11.1 IC11.2 R27.2
NetIC11_3: IC11.3 IC11.4 R27.1
NetIC12_1: IC12.1 IC12.2 R28.2
NetIC12_3: IC12.3 IC12.4 R28.1
NetIC13_1: IC13.1 R30.1
NetIC13_4: IC13.4 IC16.17 R29.2
NetIC14_1: IC14.1 R34.1
NetIC15_1: IC15.1 R36.1
NetIC16_15: IC16.15 R34.2
NetIC16_16: IC16.16 R36.2
NetIC16_26: IC16.26 R15.1
NetIC16_27: IC16.27 R16.1
"NetINPUT 1_2": "INPUT 1.2" R9.1
"NetINPUT 2_2": "INPUT 2.2" R10.1
NetK1_1: K1.1 R13.1
NetK2_1: K2.1 R14.1
NetQ1_1: Q1.1 R17.1 R19.1
NetQ2_1: Q2.1 R18.1 R20.1
NetR31_1: R31.1 U1.7
NetR32_1: R32.1 U1.6
NRESET: C38.2 IC16.7 NRST1.2 R39.1
OSC1: C39.2 IC16.6 Y1.2
OSC2: C40.1 IC16.5 Y1.1
PT100_1N: C26.1 IC11.8 IC11.9 SW1.1
PT100_1P: C26.2 IC11.5 IC11.7 SW1.4
PT100_2N: C27.1 IC12.8 IC12.9 SW2.1